# EAGLE board Arduino-Pro-Mini-GiantPanel-v14 (EAGLE 6.5.0), part 1 of 14
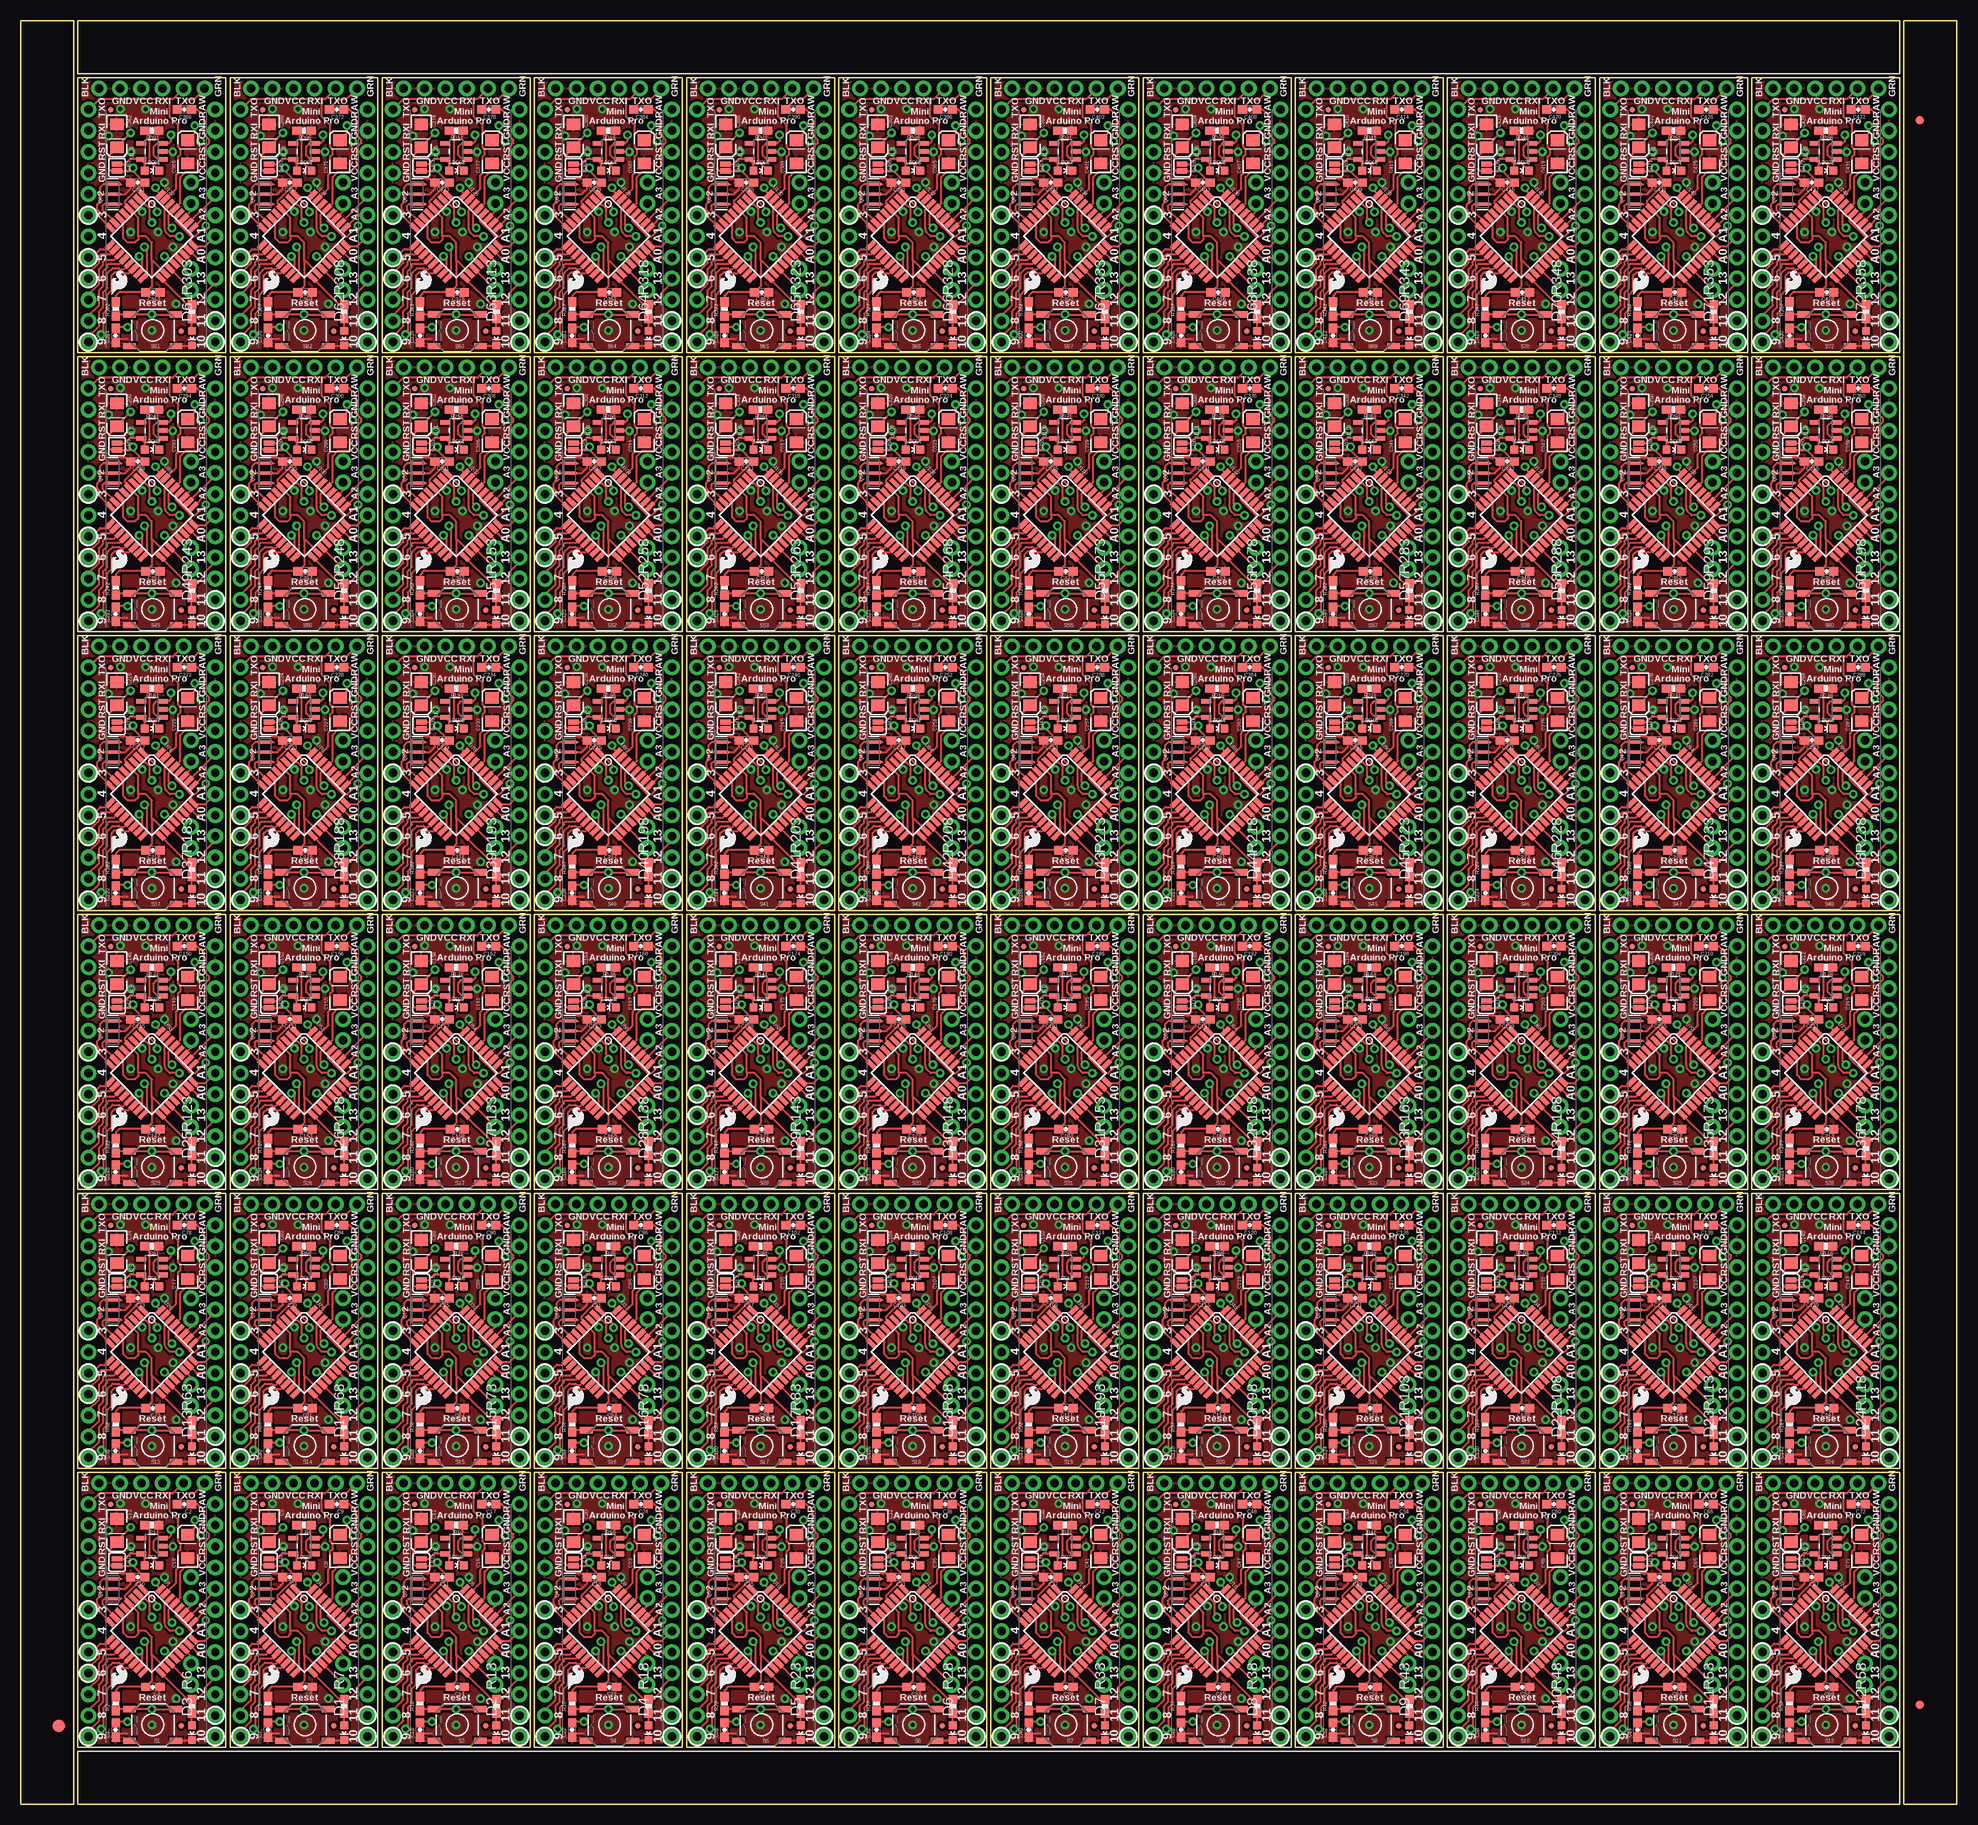
[diagram p0: board, top side]
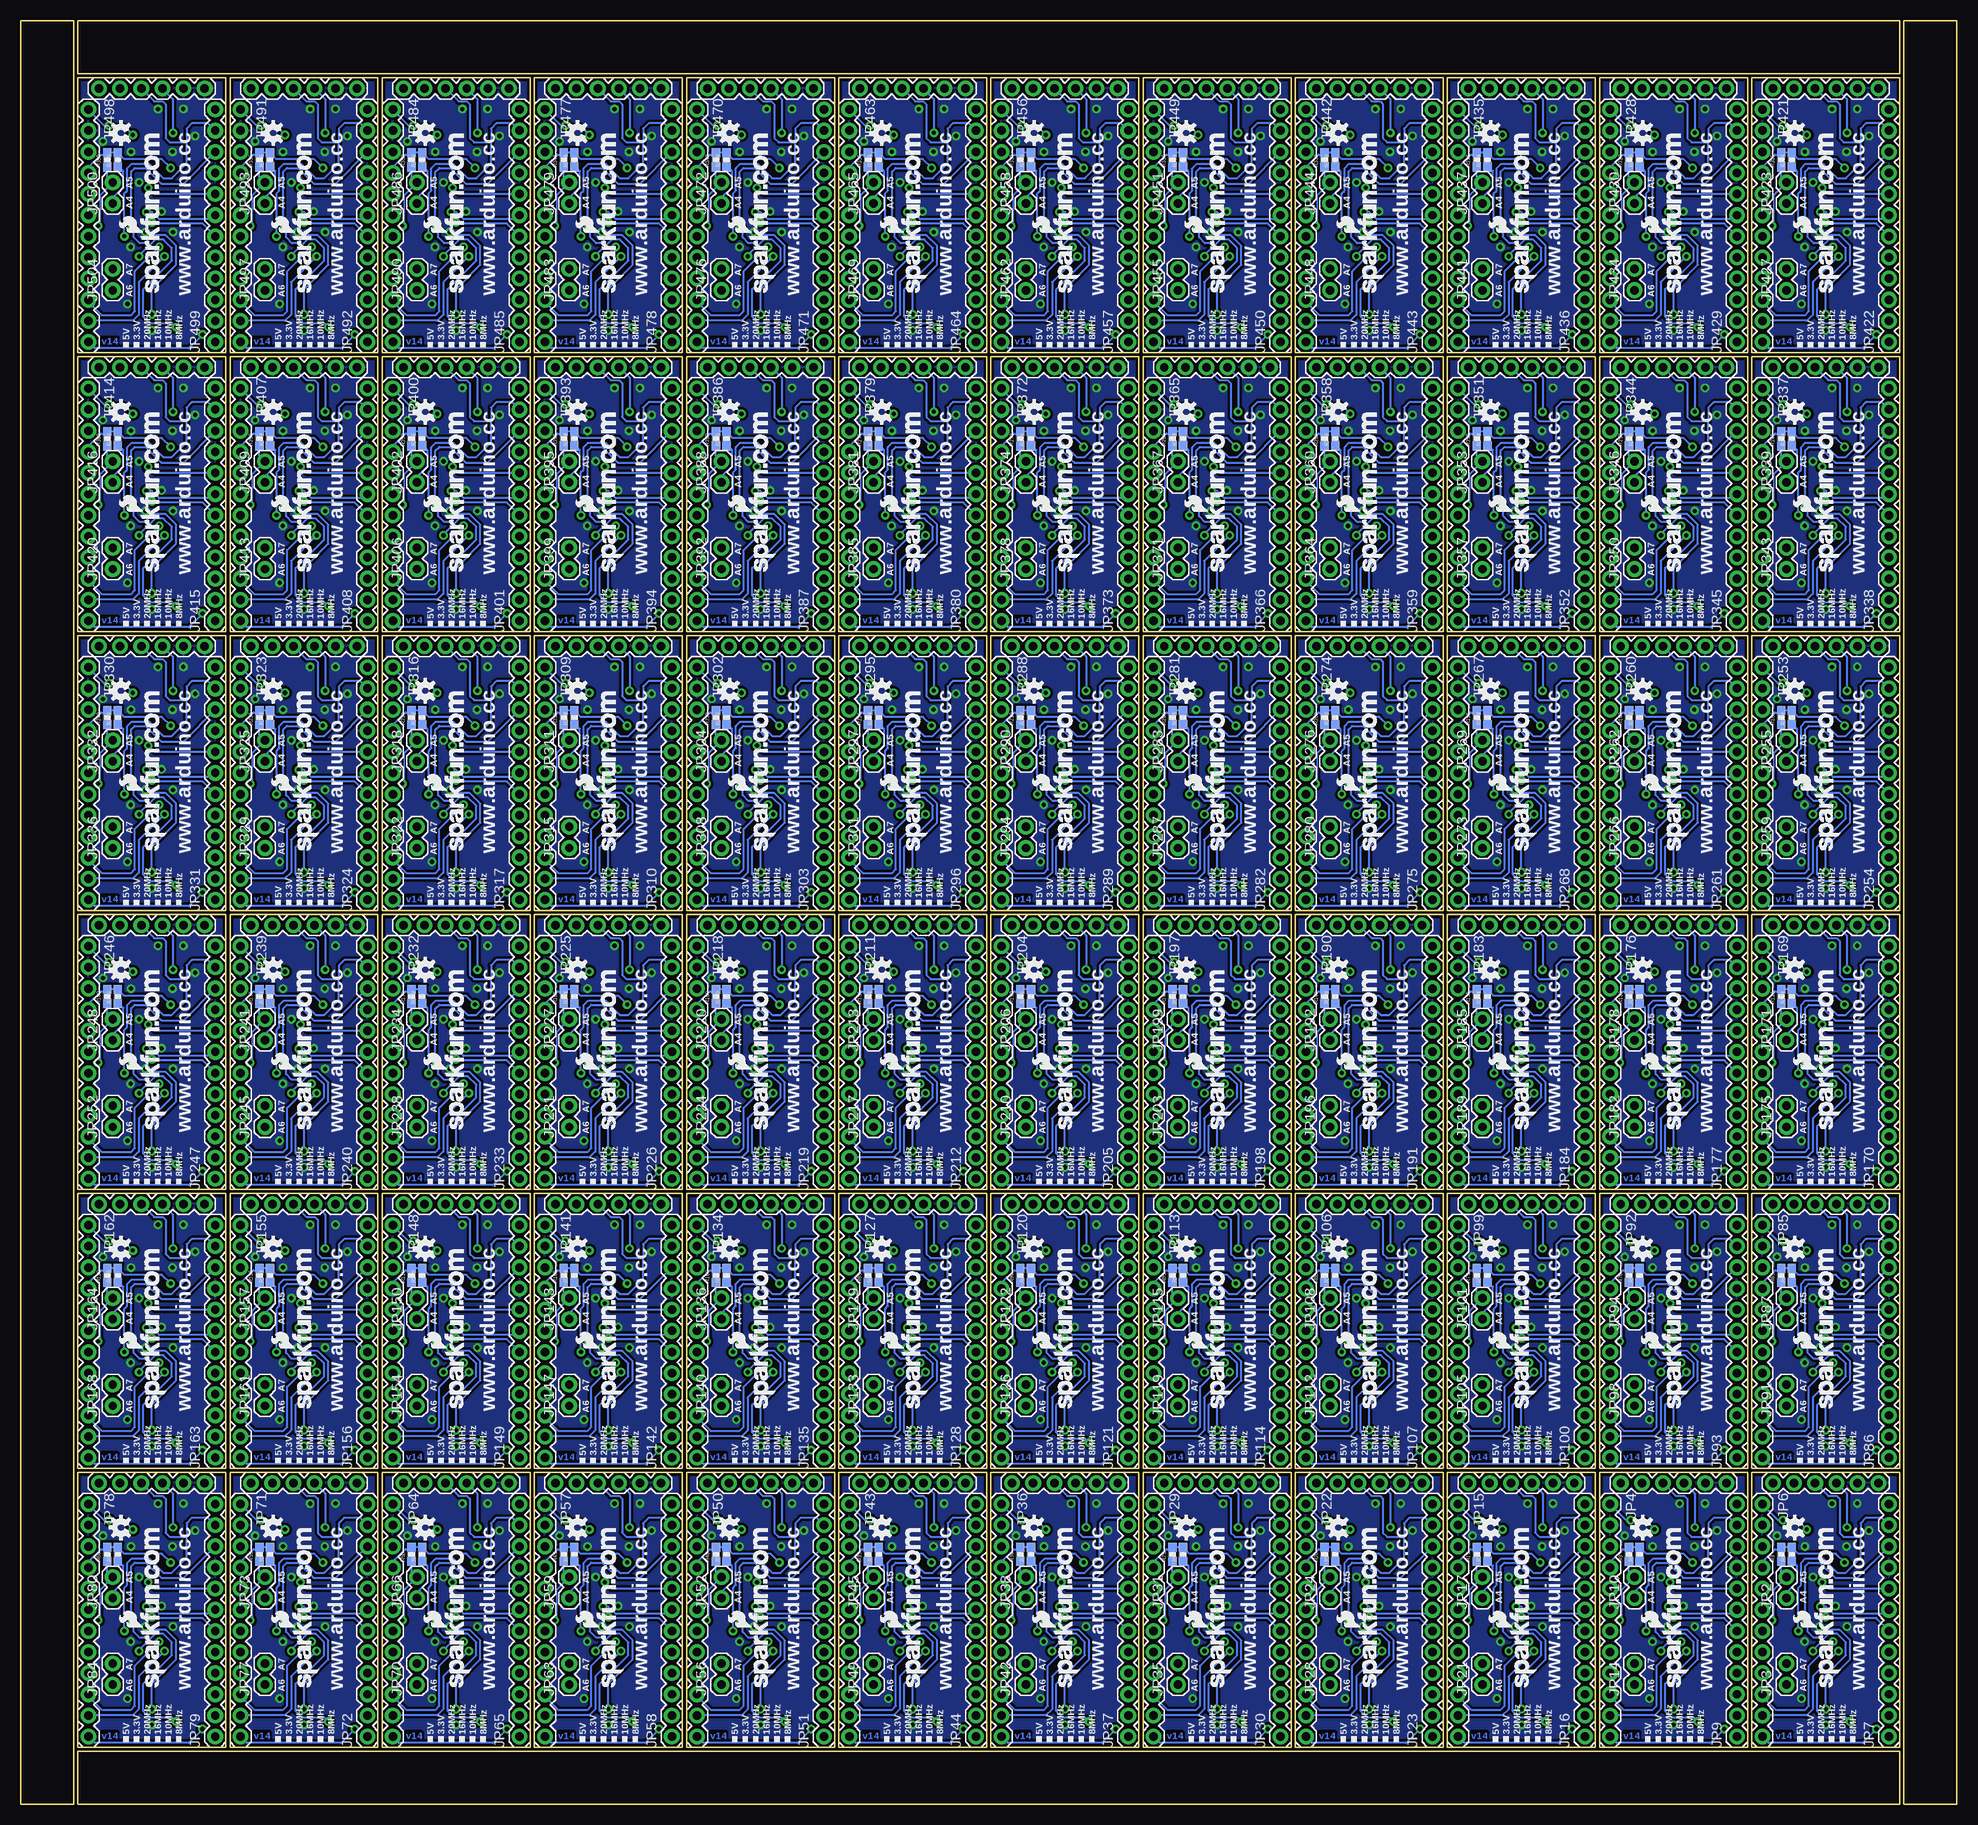
[diagram p1: board, bottom side, seen from below]

Size 232.66 x 214.38 mm. Coordinates in mm from the lower left corner, seen from the top.
Outline: 304 segments
Copper layers (1*16): Top 0.035mm / dielectric 1.5mm / Bottom 0.035mm
Design rules "SparkFun-2-layer *": minimum track width 7mil, minimum drill 15mil, track to track 8mil, track to pad 8mil, pad to pad 8mil, via to via 8mil, smd to smd 8mil, copper to edge 8mil, drill to drill 8mil, minimum pad ring 12mil, minimum via ring 10mil, stop-mask expansion 4mil, vias tented up to drill 20mil, thermal gap 10mil
Net classes: 0 default: width 0.203 mm; 1 vcc: width 0.254 mm

## Footprints (pad centres in the part's own frame; a part is rotated, then mirrored left to right if it is on the bottom)
0603-CAP = smd 1.1 x 1: 1 -0.85,0; 2 0.85,0
EIA3216 = smd 1.4 x 1.6: A 1.4,0; C -1.4,0
0603-LED-ALT1 = smd 1 x 1: A 0,-0.877; C 0,0.877
FIDUCIAL-1.5X3 = smd 1.5 x 1.5: 1 0,0
FIDUCIAL-1X2 = smd 1 x 1: 1 0,0
1X06 = drill 1.016 pad 1.88: 1 0,0; 2 2.54,0; 3 5.08,0; 4 7.62,0; 5 10.16,0; 6 12.7,0
1X02 = drill 1.016 pad 1.88: 1 0,0; 2 2.54,0
1X12 = drill 1.016 pad 1.88: 1 0,0; 2 2.54,0; 3 5.08,0; 4 7.62,0; 5 10.16,0; 6 12.7,0; 7 15.24,0; 8 17.78,0; 9 20.32,0; 10 22.86,0; 11 25.4,0; 12 27.94,0
MICRO-FIDUCIAL = smd 0.635 x 0.635: 1 0,0
RESONATOR-SMD-1:1 = smd 0.45 x 1.905: 1 -1.2,0; 2 0,0; 3 1.2,0
0603-RES = smd 1.1 x 1: 1 -0.85,0; 2 0.85,0
TACTILE-SWITCH-SMD-ALT01 = smd 1.524 x 0.762: 1 -2.794,1.905; 2 2.794,1.905; 3 -2.794,-1.905; 4 2.794,-1.905
SJ_2S = smd 0.635 x 1.27: 1 -0.412,0; 2 0.412,0
TQFP32-08 = smd 1.27 x 0.559: 1 -4.293,2.8; 2 -4.293,2; 3 -4.293,1.2; 4 -4.293,0.4; 5 -4.293,-0.4; 6 -4.293,-1.2; 7 -4.293,-2; 8 -4.293,-2.8; 17 4.293,-2.8; 18 4.293,-2; 19 4.293,-1.2; 20 4.293,-0.4; 21 4.293,0.4; 22 4.293,1.2; 23 4.293,2; 24 4.293,2.8 | smd 0.559 x 1.27: 9 -2.8,-4.293; 10 -2,-4.293; 11 -1.2,-4.293; 12 -0.4,-4.293; 13 0.4,-4.293; 14 1.2,-4.293; 15 2,-4.293; 16 2.8,-4.293; 25 2.8,4.293; 26 2,4.293; 27 1.2,4.293; 28 0.4,4.293; 29 -0.4,4.293; 30 -1.2,4.293; 31 -2,4.293; 32 -2.8,4.293
SOT23-5 = smd 0.55 x 1.2: 1 -0.95,-1.3; 2 0,-1.3; 3 0.95,-1.3; 4 0.95,1.3; 5 -0.95,1.3

## Placement (x,y rotation side)
C1  0.1uF  [0603-CAP]  11.4,8.92 90 top
C2  0.1uF  [0603-CAP]  19.66,36.07 180 top
C3  0.1uF  [0603-CAP]  15.88,14.1 180 top
C4  0.1uF  [0603-CAP]  32.33,27.28 180 top
C5  10uF  [EIA3216]  29.84,32.89 270 top
C6  0.1uF  [0603-CAP]  34.16,14.1 180 top
C7  0.1uF  [0603-CAP]  29.69,8.92 90 top
C8  10uF  [EIA3216]  38.35,30.99 90 top
C9  0.1uF  [0603-CAP]  37.95,36.07 180 top
C10  0.1uF  [0603-CAP]  14.05,27.28 180 top
C11  0.1uF  [0603-CAP]  50.62,27.28 180 top
C12  10uF  [EIA3216]  48.13,32.89 270 top
C13  10uF  [EIA3216]  11.56,32.89 270 top
C14  0.1uF  [0603-CAP]  52.45,14.1 180 top
C15  0.1uF  [0603-CAP]  47.98,8.92 90 top
C16  10uF  [EIA3216]  56.64,30.99 90 top
C17  0.1uF  [0603-CAP]  56.24,36.07 180 top
C18  0.1uF  [0603-CAP]  68.91,27.28 180 top
C19  10uF  [EIA3216]  20.07,30.99 90 top
C20  10uF  [EIA3216]  66.42,32.89 270 top
C21  0.1uF  [0603-CAP]  70.74,14.1 180 top
C22  0.1uF  [0603-CAP]  66.27,8.92 90 top
C23  10uF  [EIA3216]  74.93,30.99 90 top
C24  0.1uF  [0603-CAP]  74.52,36.07 180 top
C25  0.1uF  [0603-CAP]  87.2,27.28 180 top
C26  10uF  [EIA3216]  84.71,32.89 270 top
C27  0.1uF  [0603-CAP]  89.03,14.1 180 top
C28  0.1uF  [0603-CAP]  84.56,8.92 90 top
C29  10uF  [EIA3216]  93.22,30.99 90 top
C30  0.1uF  [0603-CAP]  92.81,36.07 180 top
C31  0.1uF  [0603-CAP]  105.49,27.28 180 top
C32  10uF  [EIA3216]  103,32.89 270 top
C33  0.1uF  [0603-CAP]  107.31,14.1 180 top
C34  0.1uF  [0603-CAP]  102.84,8.92 90 top
C35  10uF  [EIA3216]  111.51,30.99 90 top
C36  0.1uF  [0603-CAP]  111.1,36.07 180 top
C37  0.1uF  [0603-CAP]  123.77,27.28 180 top
C38  10uF  [EIA3216]  121.28,32.89 270 top
C39  0.1uF  [0603-CAP]  125.6,14.1 180 top
C40  0.1uF  [0603-CAP]  121.13,8.92 90 top
C41  10uF  [EIA3216]  129.79,30.99 90 top
C42  0.1uF  [0603-CAP]  129.39,36.07 180 top
C43  0.1uF  [0603-CAP]  142.06,27.28 180 top
C44  10uF  [EIA3216]  139.57,32.89 270 top
C45  0.1uF  [0603-CAP]  143.89,14.1 180 top
C46  0.1uF  [0603-CAP]  139.42,8.92 90 top
C47  10uF  [EIA3216]  148.08,30.99 90 top
C48  0.1uF  [0603-CAP]  147.68,36.07 180 top
C49  0.1uF  [0603-CAP]  160.35,27.28 180 top
C50  10uF  [EIA3216]  157.86,32.89 270 top
C51  0.1uF  [0603-CAP]  162.18,14.1 180 top
C52  0.1uF  [0603-CAP]  157.71,8.92 90 top
C53  10uF  [EIA3216]  166.37,30.99 90 top
C54  0.1uF  [0603-CAP]  165.96,36.07 180 top
C55  0.1uF  [0603-CAP]  178.64,27.28 180 top
C56  10uF  [EIA3216]  176.15,32.89 270 top
C57  0.1uF  [0603-CAP]  180.47,14.1 180 top
C58  0.1uF  [0603-CAP]  176,8.92 90 top
C59  10uF  [EIA3216]  184.66,30.99 90 top
C60  0.1uF  [0603-CAP]  184.25,36.07 180 top
C61  0.1uF  [0603-CAP]  196.93,27.28 180 top
C62  10uF  [EIA3216]  194.44,32.89 270 top
C63  0.1uF  [0603-CAP]  198.75,14.1 180 top
C64  0.1uF  [0603-CAP]  194.28,8.92 90 top
C65  10uF  [EIA3216]  202.95,30.99 90 top
C66  0.1uF  [0603-CAP]  202.54,36.07 180 top
C67  0.1uF  [0603-CAP]  215.21,27.28 180 top
C68  10uF  [EIA3216]  212.72,32.89 270 top
C69  0.1uF  [0603-CAP]  217.04,14.1 180 top
C70  0.1uF  [0603-CAP]  212.57,8.92 90 top
C71  10uF  [EIA3216]  221.23,30.99 90 top
C72  0.1uF  [0603-CAP]  220.83,36.07 180 top
C73  0.1uF  [0603-CAP]  14.05,60.81 180 top
C74  10uF  [EIA3216]  11.56,66.42 270 top
C75  0.1uF  [0603-CAP]  15.88,47.62 180 top
C76  0.1uF  [0603-CAP]  11.4,42.44 90 top
C77  10uF  [EIA3216]  20.07,64.52 90 top
C78  0.1uF  [0603-CAP]  19.66,69.6 180 top
C79  0.1uF  [0603-CAP]  32.33,60.81 180 top
C80  10uF  [EIA3216]  29.84,66.42 270 top
C81  0.1uF  [0603-CAP]  34.16,47.62 180 top
C82  0.1uF  [0603-CAP]  29.69,42.44 90 top
C83  10uF  [EIA3216]  38.35,64.52 90 top
C84  0.1uF  [0603-CAP]  37.95,69.6 180 top
C85  0.1uF  [0603-CAP]  50.62,60.81 180 top
C86  10uF  [EIA3216]  48.13,66.42 270 top
C87  0.1uF  [0603-CAP]  52.45,47.62 180 top
C88  0.1uF  [0603-CAP]  47.98,42.44 90 top
C89  10uF  [EIA3216]  56.64,64.52 90 top
C90  0.1uF  [0603-CAP]  56.24,69.6 180 top
C91  0.1uF  [0603-CAP]  68.91,60.81 180 top
C92  10uF  [EIA3216]  66.42,66.42 270 top
C93  0.1uF  [0603-CAP]  70.74,47.62 180 top
C94  0.1uF  [0603-CAP]  66.27,42.44 90 top
C95  10uF  [EIA3216]  74.93,64.52 90 top
C96  0.1uF  [0603-CAP]  74.52,69.6 180 top
C97  0.1uF  [0603-CAP]  87.2,60.81 180 top
C98  10uF  [EIA3216]  84.71,66.42 270 top
C99  0.1uF  [0603-CAP]  89.03,47.62 180 top
C100  0.1uF  [0603-CAP]  84.56,42.44 90 top
C101  10uF  [EIA3216]  93.22,64.52 90 top
C102  0.1uF  [0603-CAP]  92.81,69.6 180 top
C103  0.1uF  [0603-CAP]  105.49,60.81 180 top
C104  10uF  [EIA3216]  103,66.42 270 top
C105  0.1uF  [0603-CAP]  107.31,47.62 180 top
C106  0.1uF  [0603-CAP]  102.84,42.44 90 top
C107  10uF  [EIA3216]  111.51,64.52 90 top
C108  0.1uF  [0603-CAP]  111.1,69.6 180 top
C109  0.1uF  [0603-CAP]  123.77,60.81 180 top
C110  10uF  [EIA3216]  121.28,66.42 270 top
C111  0.1uF  [0603-CAP]  125.6,47.62 180 top
C112  0.1uF  [0603-CAP]  121.13,42.44 90 top
C113  10uF  [EIA3216]  129.79,64.52 90 top
C114  0.1uF  [0603-CAP]  129.39,69.6 180 top
C115  0.1uF  [0603-CAP]  142.06,60.81 180 top
C116  10uF  [EIA3216]  139.57,66.42 270 top
C117  0.1uF  [0603-CAP]  143.89,47.62 180 top
C118  0.1uF  [0603-CAP]  139.42,42.44 90 top
C119  10uF  [EIA3216]  148.08,64.52 90 top
C120  0.1uF  [0603-CAP]  147.68,69.6 180 top
C121  0.1uF  [0603-CAP]  160.35,60.81 180 top
C122  10uF  [EIA3216]  157.86,66.42 270 top
C123  0.1uF  [0603-CAP]  162.18,47.62 180 top
C124  0.1uF  [0603-CAP]  157.71,42.44 90 top
C125  10uF  [EIA3216]  166.37,64.52 90 top
C126  0.1uF  [0603-CAP]  165.96,69.6 180 top
C127  0.1uF  [0603-CAP]  178.64,60.81 180 top
C128  10uF  [EIA3216]  176.15,66.42 270 top
C129  0.1uF  [0603-CAP]  180.47,47.62 180 top
C130  0.1uF  [0603-CAP]  176,42.44 90 top
C131  10uF  [EIA3216]  184.66,64.52 90 top
C132  0.1uF  [0603-CAP]  184.25,69.6 180 top
C133  0.1uF  [0603-CAP]  196.93,60.81 180 top
C134  10uF  [EIA3216]  194.44,66.42 270 top
C135  0.1uF  [0603-CAP]  198.75,47.62 180 top
C136  0.1uF  [0603-CAP]  194.28,42.44 90 top
C137  10uF  [EIA3216]  202.95,64.52 90 top
C138  0.1uF  [0603-CAP]  202.54,69.6 180 top
C139  0.1uF  [0603-CAP]  215.21,60.81 180 top
C140  10uF  [EIA3216]  212.72,66.42 270 top
C141  0.1uF  [0603-CAP]  217.04,47.62 180 top
C142  0.1uF  [0603-CAP]  212.57,42.44 90 top
C143  10uF  [EIA3216]  221.23,64.52 90 top
C144  0.1uF  [0603-CAP]  220.83,69.6 180 top
C145  0.1uF  [0603-CAP]  14.05,94.34 180 top
C146  10uF  [EIA3216]  11.56,99.95 270 top
C147  0.1uF  [0603-CAP]  15.88,81.15 180 top
C148  0.1uF  [0603-CAP]  11.4,75.97 90 top
C149  10uF  [EIA3216]  20.07,98.04 90 top
C150  0.1uF  [0603-CAP]  19.66,103.12 180 top
C151  0.1uF  [0603-CAP]  32.33,94.34 180 top
C152  10uF  [EIA3216]  29.84,99.95 270 top
C153  0.1uF  [0603-CAP]  34.16,81.15 180 top
C154  0.1uF  [0603-CAP]  29.69,75.97 90 top
C155  10uF  [EIA3216]  38.35,98.04 90 top
C156  0.1uF  [0603-CAP]  37.95,103.12 180 top
C157  0.1uF  [0603-CAP]  50.62,94.34 180 top
C158  10uF  [EIA3216]  48.13,99.95 270 top
C159  0.1uF  [0603-CAP]  52.45,81.15 180 top
C160  0.1uF  [0603-CAP]  47.98,75.97 90 top
C161  10uF  [EIA3216]  56.64,98.04 90 top
C162  0.1uF  [0603-CAP]  56.24,103.12 180 top
C163  0.1uF  [0603-CAP]  68.91,94.34 180 top
C164  10uF  [EIA3216]  66.42,99.95 270 top
C165  0.1uF  [0603-CAP]  70.74,81.15 180 top
C166  0.1uF  [0603-CAP]  66.27,75.97 90 top
C167  10uF  [EIA3216]  74.93,98.04 90 top
C168  0.1uF  [0603-CAP]  74.52,103.12 180 top
C169  0.1uF  [0603-CAP]  87.2,94.34 180 top
C170  10uF  [EIA3216]  84.71,99.95 270 top
C171  0.1uF  [0603-CAP]  89.03,81.15 180 top
C172  0.1uF  [0603-CAP]  84.56,75.97 90 top
C173  10uF  [EIA3216]  93.22,98.04 90 top
C174  0.1uF  [0603-CAP]  92.81,103.12 180 top
C175  0.1uF  [0603-CAP]  105.49,94.34 180 top
C176  10uF  [EIA3216]  103,99.95 270 top
C177  0.1uF  [0603-CAP]  107.31,81.15 180 top
C178  0.1uF  [0603-CAP]  102.84,75.97 90 top
C179  10uF  [EIA3216]  111.51,98.04 90 top
C180  0.1uF  [0603-CAP]  111.1,103.12 180 top
C181  0.1uF  [0603-CAP]  123.77,94.34 180 top
C182  10uF  [EIA3216]  121.28,99.95 270 top
C183  0.1uF  [0603-CAP]  125.6,81.15 180 top
C184  0.1uF  [0603-CAP]  121.13,75.97 90 top
C185  10uF  [EIA3216]  129.79,98.04 90 top
C186  0.1uF  [0603-CAP]  129.39,103.12 180 top
C187  0.1uF  [0603-CAP]  142.06,94.34 180 top
C188  10uF  [EIA3216]  139.57,99.95 270 top
C189  0.1uF  [0603-CAP]  143.89,81.15 180 top
C190  0.1uF  [0603-CAP]  139.42,75.97 90 top
C191  10uF  [EIA3216]  148.08,98.04 90 top
C192  0.1uF  [0603-CAP]  147.68,103.12 180 top
C193  0.1uF  [0603-CAP]  160.35,94.34 180 top
C194  10uF  [EIA3216]  157.86,99.95 270 top
C195  0.1uF  [0603-CAP]  162.18,81.15 180 top
C196  0.1uF  [0603-CAP]  157.71,75.97 90 top
C197  10uF  [EIA3216]  166.37,98.04 90 top
C198  0.1uF  [0603-CAP]  165.96,103.12 180 top
C199  0.1uF  [0603-CAP]  178.64,94.34 180 top
C200  10uF  [EIA3216]  176.15,99.95 270 top
C201  0.1uF  [0603-CAP]  180.47,81.15 180 top
C202  0.1uF  [0603-CAP]  176,75.97 90 top
C203  10uF  [EIA3216]  184.66,98.04 90 top
C204  0.1uF  [0603-CAP]  184.25,103.12 180 top
C205  0.1uF  [0603-CAP]  196.93,94.34 180 top
C206  10uF  [EIA3216]  194.44,99.95 270 top
C207  0.1uF  [0603-CAP]  198.75,81.15 180 top
C208  0.1uF  [0603-CAP]  194.28,75.97 90 top
C209  10uF  [EIA3216]  202.95,98.04 90 top
C210  0.1uF  [0603-CAP]  202.54,103.12 180 top
C211  0.1uF  [0603-CAP]  215.21,94.34 180 top
C212  10uF  [EIA3216]  212.72,99.95 270 top
C213  0.1uF  [0603-CAP]  217.04,81.15 180 top
C214  0.1uF  [0603-CAP]  212.57,75.97 90 top
C215  10uF  [EIA3216]  221.23,98.04 90 top
C216  0.1uF  [0603-CAP]  220.83,103.12 180 top
C217  0.1uF  [0603-CAP]  14.05,127.86 180 top
C218  10uF  [EIA3216]  11.56,133.48 270 top
C219  0.1uF  [0603-CAP]  15.88,114.68 180 top
C220  0.1uF  [0603-CAP]  11.4,109.5 90 top
C221  10uF  [EIA3216]  20.07,131.57 90 top
C222  0.1uF  [0603-CAP]  19.66,136.65 180 top
C223  0.1uF  [0603-CAP]  32.33,127.86 180 top
C224  10uF  [EIA3216]  29.84,133.48 270 top
C225  0.1uF  [0603-CAP]  34.16,114.68 180 top
C226  0.1uF  [0603-CAP]  29.69,109.5 90 top
C227  10uF  [EIA3216]  38.35,131.57 90 top
C228  0.1uF  [0603-CAP]  37.95,136.65 180 top
C229  0.1uF  [0603-CAP]  50.62,127.86 180 top
C230  10uF  [EIA3216]  48.13,133.48 270 top
C231  0.1uF  [0603-CAP]  52.45,114.68 180 top
C232  0.1uF  [0603-CAP]  47.98,109.5 90 top
C233  10uF  [EIA3216]  56.64,131.57 90 top
C234  0.1uF  [0603-CAP]  56.24,136.65 180 top
C235  0.1uF  [0603-CAP]  68.91,127.86 180 top
C236  10uF  [EIA3216]  66.42,133.48 270 top
C237  0.1uF  [0603-CAP]  70.74,114.68 180 top
C238  0.1uF  [0603-CAP]  66.27,109.5 90 top
C239  10uF  [EIA3216]  74.93,131.57 90 top
C240  0.1uF  [0603-CAP]  74.52,136.65 180 top
C241  0.1uF  [0603-CAP]  87.2,127.86 180 top
C242  10uF  [EIA3216]  84.71,133.48 270 top
C243  0.1uF  [0603-CAP]  89.03,114.68 180 top
C244  0.1uF  [0603-CAP]  84.56,109.5 90 top
C245  10uF  [EIA3216]  93.22,131.57 90 top
C246  0.1uF  [0603-CAP]  92.81,136.65 180 top
C247  0.1uF  [0603-CAP]  105.49,127.86 180 top
C248  10uF  [EIA3216]  103,133.48 270 top
C249  0.1uF  [0603-CAP]  107.31,114.68 180 top
C250  0.1uF  [0603-CAP]  102.84,109.5 90 top
C251  10uF  [EIA3216]  111.51,131.57 90 top
C252  0.1uF  [0603-CAP]  111.1,136.65 180 top
C253  0.1uF  [0603-CAP]  123.77,127.86 180 top
C254  10uF  [EIA3216]  121.28,133.48 270 top
C255  0.1uF  [0603-CAP]  125.6,114.68 180 top
C256  0.1uF  [0603-CAP]  121.13,109.5 90 top
C257  10uF  [EIA3216]  129.79,131.57 90 top
C258  0.1uF  [0603-CAP]  129.39,136.65 180 top
C259  0.1uF  [0603-CAP]  142.06,127.86 180 top
C260  10uF  [EIA3216]  139.57,133.48 270 top
C261  0.1uF  [0603-CAP]  143.89,114.68 180 top
C262  0.1uF  [0603-CAP]  139.42,109.5 90 top
C263  10uF  [EIA3216]  148.08,131.57 90 top
C264  0.1uF  [0603-CAP]  147.68,136.65 180 top
C265  0.1uF  [0603-CAP]  160.35,127.86 180 top
C266  10uF  [EIA3216]  157.86,133.48 270 top
C267  0.1uF  [0603-CAP]  162.18,114.68 180 top
C268  0.1uF  [0603-CAP]  157.71,109.5 90 top
C269  10uF  [EIA3216]  166.37,131.57 90 top
C270  0.1uF  [0603-CAP]  165.96,136.65 180 top
C271  0.1uF  [0603-CAP]  178.64,127.86 180 top
C272  10uF  [EIA3216]  176.15,133.48 270 top
C273  0.1uF  [0603-CAP]  180.47,114.68 180 top
C274  0.1uF  [0603-CAP]  176,109.5 90 top
C275  10uF  [EIA3216]  184.66,131.57 90 top
C276  0.1uF  [0603-CAP]  184.25,136.65 180 top
C277  0.1uF  [0603-CAP]  196.93,127.86 180 top
C278  10uF  [EIA3216]  194.44,133.48 270 top
C279  0.1uF  [0603-CAP]  198.75,114.68 180 top
C280  0.1uF  [0603-CAP]  194.28,109.5 90 top
C281  10uF  [EIA3216]  202.95,131.57 90 top
C282  0.1uF  [0603-CAP]  202.54,136.65 180 top
C283  0.1uF  [0603-CAP]  215.21,127.86 180 top
C284  10uF  [EIA3216]  212.72,133.48 270 top
C285  0.1uF  [0603-CAP]  217.04,114.68 180 top
C286  0.1uF  [0603-CAP]  212.57,109.5 90 top
C287  10uF  [EIA3216]  221.23,131.57 90 top
C288  0.1uF  [0603-CAP]  220.83,136.65 180 top
C289  0.1uF  [0603-CAP]  14.05,161.39 180 top
C290  10uF  [EIA3216]  11.56,167 270 top
C291  0.1uF  [0603-CAP]  15.88,148.21 180 top
C292  0.1uF  [0603-CAP]  11.4,143.03 90 top
C293  10uF  [EIA3216]  20.07,165.1 90 top
C294  0.1uF  [0603-CAP]  19.66,170.18 180 top
C295  0.1uF  [0603-CAP]  32.33,161.39 180 top
C296  10uF  [EIA3216]  29.84,167 270 top
C297  0.1uF  [0603-CAP]  34.16,148.21 180 top
C298  0.1uF  [0603-CAP]  29.69,143.03 90 top
C299  10uF  [EIA3216]  38.35,165.1 90 top
C300  0.1uF  [0603-CAP]  37.95,170.18 180 top
C301  0.1uF  [0603-CAP]  50.62,161.39 180 top
C302  10uF  [EIA3216]  48.13,167 270 top
C303  0.1uF  [0603-CAP]  52.45,148.21 180 top
C304  0.1uF  [0603-CAP]  47.98,143.03 90 top
C305  10uF  [EIA3216]  56.64,165.1 90 top
C306  0.1uF  [0603-CAP]  56.24,170.18 180 top
C307  0.1uF  [0603-CAP]  68.91,161.39 180 top
C308  10uF  [EIA3216]  66.42,167 270 top
C309  0.1uF  [0603-CAP]  70.74,148.21 180 top
C310  0.1uF  [0603-CAP]  66.27,143.03 90 top
C311  10uF  [EIA3216]  74.93,165.1 90 top
C312  0.1uF  [0603-CAP]  74.52,170.18 180 top
C313  0.1uF  [0603-CAP]  87.2,161.39 180 top
C314  10uF  [EIA3216]  84.71,167 270 top
C315  0.1uF  [0603-CAP]  89.03,148.21 180 top
C316  0.1uF  [0603-CAP]  84.56,143.03 90 top
C317  10uF  [EIA3216]  93.22,165.1 90 top
C318  0.1uF  [0603-CAP]  92.81,170.18 180 top
C319  0.1uF  [0603-CAP]  105.49,161.39 180 top
C320  10uF  [EIA3216]  103,167 270 top
C321  0.1uF  [0603-CAP]  107.31,148.21 180 top
C322  0.1uF  [0603-CAP]  102.84,143.03 90 top
C323  10uF  [EIA3216]  111.51,165.1 90 top
C324  0.1uF  [0603-CAP]  111.1,170.18 180 top
C325  0.1uF  [0603-CAP]  123.77,161.39 180 top
C326  10uF  [EIA3216]  121.28,167 270 top
C327  0.1uF  [0603-CAP]  125.6,148.21 180 top
C328  0.1uF  [0603-CAP]  121.13,143.03 90 top
C329  10uF  [EIA3216]  129.79,165.1 90 top
C330  0.1uF  [0603-CAP]  129.39,170.18 180 top
C331  0.1uF  [0603-CAP]  142.06,161.39 180 top
C332  10uF  [EIA3216]  139.57,167 270 top
C333  0.1uF  [0603-CAP]  143.89,148.21 180 top
C334  0.1uF  [0603-CAP]  139.42,143.03 90 top
C335  10uF  [EIA3216]  148.08,165.1 90 top
C336  0.1uF  [0603-CAP]  147.68,170.18 180 top
C337  0.1uF  [0603-CAP]  160.35,161.39 180 top
C338  10uF  [EIA3216]  157.86,167 270 top
C339  0.1uF  [0603-CAP]  162.18,148.21 180 top
C340  0.1uF  [0603-CAP]  157.71,143.03 90 top
C341  10uF  [EIA3216]  166.37,165.1 90 top
C342  0.1uF  [0603-CAP]  165.96,170.18 180 top
C343  0.1uF  [0603-CAP]  178.64,161.39 180 top
C344  10uF  [EIA3216]  176.15,167 270 top
C345  0.1uF  [0603-CAP]  180.47,148.21 180 top
C346  0.1uF  [0603-CAP]  176,143.03 90 top
C347  10uF  [EIA3216]  184.66,165.1 90 top
C348  0.1uF  [0603-CAP]  184.25,170.18 180 top
C349  0.1uF  [0603-CAP]  196.93,161.39 180 top
C350  10uF  [EIA3216]  194.44,167 270 top
C351  0.1uF  [0603-CAP]  198.75,148.21 180 top
C352  0.1uF  [0603-CAP]  194.28,143.03 90 top
C353  10uF  [EIA3216]  202.95,165.1 90 top
C354  0.1uF  [0603-CAP]  202.54,170.18 180 top
C355  0.1uF  [0603-CAP]  215.21,161.39 180 top
C356  10uF  [EIA3216]  212.72,167 270 top
C357  0.1uF  [0603-CAP]  217.04,148.21 180 top
C358  0.1uF  [0603-CAP]  212.57,143.03 90 top
C359  10uF  [EIA3216]  221.23,165.1 90 top
C360  0.1uF  [0603-CAP]  220.83,170.18 180 top
C361  0.1uF  [0603-CAP]  14.05,194.92 180 top
C362  10uF  [EIA3216]  11.56,200.53 270 top
C363  0.1uF  [0603-CAP]  15.88,181.74 180 top
C364  0.1uF  [0603-CAP]  11.4,176.56 90 top
C365  10uF  [EIA3216]  20.07,198.63 90 top
C366  0.1uF  [0603-CAP]  19.66,203.71 180 top
C367  0.1uF  [0603-CAP]  32.33,194.92 180 top
C368  10uF  [EIA3216]  29.84,200.53 270 top
C369  0.1uF  [0603-CAP]  34.16,181.74 180 top
C370  0.1uF  [0603-CAP]  29.69,176.56 90 top
C371  10uF  [EIA3216]  38.35,198.63 90 top
C372  0.1uF  [0603-CAP]  37.95,203.71 180 top
C373  0.1uF  [0603-CAP]  50.62,194.92 180 top
C374  10uF  [EIA3216]  48.13,200.53 270 top
C375  0.1uF  [0603-CAP]  52.45,181.74 180 top
C376  0.1uF  [0603-CAP]  47.98,176.56 90 top
C377  10uF  [EIA3216]  56.64,198.63 90 top
C378  0.1uF  [0603-CAP]  56.24,203.71 180 top
C379  0.1uF  [0603-CAP]  68.91,194.92 180 top
C380  10uF  [EIA3216]  66.42,200.53 270 top
C381  0.1uF  [0603-CAP]  70.74,181.74 180 top
C382  0.1uF  [0603-CAP]  66.27,176.56 90 top
C383  10uF  [EIA3216]  74.93,198.63 90 top
C384  0.1uF  [0603-CAP]  74.52,203.71 180 top
C385  0.1uF  [0603-CAP]  87.2,194.92 180 top
C386  10uF  [EIA3216]  84.71,200.53 270 top
C387  0.1uF  [0603-CAP]  89.03,181.74 180 top
C388  0.1uF  [0603-CAP]  84.56,176.56 90 top
C389  10uF  [EIA3216]  93.22,198.63 90 top
C390  0.1uF  [0603-CAP]  92.81,203.71 180 top
C391  0.1uF  [0603-CAP]  105.49,194.92 180 top
C392  10uF  [EIA3216]  103,200.53 270 top
C393  0.1uF  [0603-CAP]  107.31,181.74 180 top
C394  0.1uF  [0603-CAP]  102.84,176.56 90 top
C395  10uF  [EIA3216]  111.51,198.63 90 top
C396  0.1uF  [0603-CAP]  111.1,203.71 180 top
C397  0.1uF  [0603-CAP]  123.77,194.92 180 top
C398  10uF  [EIA3216]  121.28,200.53 270 top
C399  0.1uF  [0603-CAP]  125.6,181.74 180 top
C400  0.1uF  [0603-CAP]  121.13,176.56 90 top
C401  10uF  [EIA3216]  129.79,198.63 90 top
C402  0.1uF  [0603-CAP]  129.39,203.71 180 top
C403  0.1uF  [0603-CAP]  142.06,194.92 180 top
C404  10uF  [EIA3216]  139.57,200.53 270 top
C405  0.1uF  [0603-CAP]  143.89,181.74 180 top
C406  0.1uF  [0603-CAP]  139.42,176.56 90 top
C407  10uF  [EIA3216]  148.08,198.63 90 top
C408  0.1uF  [0603-CAP]  147.68,203.71 180 top
C409  0.1uF  [0603-CAP]  160.35,194.92 180 top
C410  10uF  [EIA3216]  157.86,200.53 270 top
C411  0.1uF  [0603-CAP]  162.18,181.74 180 top
C412  0.1uF  [0603-CAP]  157.71,176.56 90 top
C413  10uF  [EIA3216]  166.37,198.63 90 top
C414  0.1uF  [0603-CAP]  165.96,203.71 180 top
C415  0.1uF  [0603-CAP]  178.64,194.92 180 top
C416  10uF  [EIA3216]  176.15,200.53 270 top
C417  0.1uF  [0603-CAP]  180.47,181.74 180 top
C418  0.1uF  [0603-CAP]  176,176.56 90 top
C419  10uF  [EIA3216]  184.66,198.63 90 top
C420  0.1uF  [0603-CAP]  184.25,203.71 180 top
C421  0.1uF  [0603-CAP]  196.93,194.92 180 top
C422  10uF  [EIA3216]  194.44,200.53 270 top
C423  0.1uF  [0603-CAP]  198.75,181.74 180 top
C424  0.1uF  [0603-CAP]  194.28,176.56 90 top
C425  10uF  [EIA3216]  202.95,198.63 90 top
C426  0.1uF  [0603-CAP]  202.54,203.71 180 top
C427  0.1uF  [0603-CAP]  215.21,194.92 180 top
C428  10uF  [EIA3216]  212.72,200.53 270 top
C429  0.1uF  [0603-CAP]  217.04,181.74 180 top
C430  0.1uF  [0603-CAP]  212.57,176.56 90 top
C431  10uF  [EIA3216]  221.23,198.63 90 top
C432  0.1uF  [0603-CAP]  220.83,203.71 180 top
D1  Green  [0603-LED-ALT1]  38.86,8.59 180 top
D2  Green  [0603-LED-ALT1]  57.15,8.59 180 top
D3  Green  [0603-LED-ALT1]  20.57,8.59 180 top
D4  Green  [0603-LED-ALT1]  75.44,8.59 180 top
D5  Green  [0603-LED-ALT1]  93.73,8.59 180 top
D6  Green  [0603-LED-ALT1]  112.01,8.59 180 top
D7  Green  [0603-LED-ALT1]  130.3,8.59 180 top
D8  Green  [0603-LED-ALT1]  148.59,8.59 180 top
D9  Green  [0603-LED-ALT1]  166.88,8.59 180 top
D10  Green  [0603-LED-ALT1]  185.17,8.59 180 top
D11  Green  [0603-LED-ALT1]  203.45,8.59 180 top
D12  Green  [0603-LED-ALT1]  221.74,8.59 180 top
D13  Green  [0603-LED-ALT1]  20.57,42.11 180 top
D14  Green  [0603-LED-ALT1]  38.86,42.11 180 top
D15  Green  [0603-LED-ALT1]  57.15,42.11 180 top
D16  Green  [0603-LED-ALT1]  75.44,42.11 180 top
D17  Green  [0603-LED-ALT1]  93.73,42.11 180 top
D18  Green  [0603-LED-ALT1]  112.01,42.11 180 top
D19  Green  [0603-LED-ALT1]  130.3,42.11 180 top
D20  Green  [0603-LED-ALT1]  148.59,42.11 180 top
D21  Green  [0603-LED-ALT1]  166.88,42.11 180 top
D22  Green  [0603-LED-ALT1]  185.17,42.11 180 top
D23  Green  [0603-LED-ALT1]  203.45,42.11 180 top
D24  Green  [0603-LED-ALT1]  221.74,42.11 180 top
D25  Green  [0603-LED-ALT1]  20.57,75.64 180 top
D26  Green  [0603-LED-ALT1]  38.86,75.64 180 top
D27  Green  [0603-LED-ALT1]  57.15,75.64 180 top
D28  Green  [0603-LED-ALT1]  75.44,75.64 180 top
D29  Green  [0603-LED-ALT1]  93.73,75.64 180 top
D30  Green  [0603-LED-ALT1]  112.01,75.64 180 top
D31  Green  [0603-LED-ALT1]  130.3,75.64 180 top
D32  Green  [0603-LED-ALT1]  148.59,75.64 180 top
D33  Green  [0603-LED-ALT1]  166.88,75.64 180 top
D34  Green  [0603-LED-ALT1]  185.17,75.64 180 top
D35  Green  [0603-LED-ALT1]  203.45,75.64 180 top
D36  Green  [0603-LED-ALT1]  221.74,75.64 180 top
D37  Green  [0603-LED-ALT1]  20.57,109.17 180 top
D38  Green  [0603-LED-ALT1]  38.86,109.17 180 top
D39  Green  [0603-LED-ALT1]  57.15,109.17 180 top
D40  Green  [0603-LED-ALT1]  75.44,109.17 180 top
D41  Green  [0603-LED-ALT1]  93.73,109.17 180 top
D42  Green  [0603-LED-ALT1]  112.01,109.17 180 top
D43  Green  [0603-LED-ALT1]  130.3,109.17 180 top
D44  Green  [0603-LED-ALT1]  148.59,109.17 180 top
D45  Green  [0603-LED-ALT1]  166.88,109.17 180 top
D46  Green  [0603-LED-ALT1]  185.17,109.17 180 top
D47  Green  [0603-LED-ALT1]  203.45,109.17 180 top
D48  Green  [0603-LED-ALT1]  221.74,109.17 180 top
D49  Green  [0603-LED-ALT1]  20.57,142.7 180 top
D50  Green  [0603-LED-ALT1]  38.86,142.7 180 top
D51  Green  [0603-LED-ALT1]  57.15,142.7 180 top
D52  Green  [0603-LED-ALT1]  75.44,142.7 180 top
D53  Green  [0603-LED-ALT1]  93.73,142.7 180 top
D54  Green  [0603-LED-ALT1]  112.01,142.7 180 top
D55  Green  [0603-LED-ALT1]  130.3,142.7 180 top
D56  Green  [0603-LED-ALT1]  148.59,142.7 180 top
D57  Green  [0603-LED-ALT1]  166.88,142.7 180 top
D58  Green  [0603-LED-ALT1]  185.17,142.7 180 top
D59  Green  [0603-LED-ALT1]  203.45,142.7 180 top
D60  Green  [0603-LED-ALT1]  221.74,142.7 180 top
D61  Green  [0603-LED-ALT1]  20.57,176.23 180 top
D62  Green  [0603-LED-ALT1]  38.86,176.23 180 top
D63  Green  [0603-LED-ALT1]  57.15,176.23 180 top
D64  Green  [0603-LED-ALT1]  75.44,176.23 180 top
D65  Green  [0603-LED-ALT1]  93.73,176.23 180 top
D66  Green  [0603-LED-ALT1]  112.01,176.23 180 top
D67  Green  [0603-LED-ALT1]  130.3,176.23 180 top
D68  Green  [0603-LED-ALT1]  148.59,176.23 180 top
D69  Green  [0603-LED-ALT1]  166.88,176.23 180 top
D70  Green  [0603-LED-ALT1]  185.17,176.23 180 top
D71  Green  [0603-LED-ALT1]  203.45,176.23 180 top
D72  Green  [0603-LED-ALT1]  221.74,176.23 180 top
E$1  [FIDUCIAL-1.5X3]  4.57,9.4 0 top
E$4  [FIDUCIAL-1X2]  228.22,11.94 0 top
E$6  [FIDUCIAL-1X2]  228.22,202.44 180 top
JP1  FTDI Basic  [1X06]  22.1,38.61 0 bottom
JP2  [1X02]  20.45,24.77 90 bottom
JP3  [1X02]  20.45,14.35 90 bottom
JP4  [1X12]  41.66,36.07 270 bottom
JP5  FIDUCIALUFIDUCIAL  [MICRO-FIDUCIAL]  10.79,36.07 0 top
JP6  [1X12]  23.37,36.07 270 bottom
JP7  [1X12]  8.13,8.13 90 bottom
JP8  FIDUCIALUFIDUCIAL  [MICRO-FIDUCIAL]  19.3,9.4 0 top
JP9  [1X12]  26.42,8.13 90 bottom
JP10  [1X02]  38.73,24.77 90 bottom
JP11  FTDI Basic  [1X06]  40.39,38.61 0 bottom
JP12  FIDUCIALUFIDUCIAL  [MICRO-FIDUCIAL]  29.08,36.07 0 top
JP13  FIDUCIALUFIDUCIAL  [MICRO-FIDUCIAL]  37.59,9.4 0 top
JP14  [1X02]  38.73,14.35 90 bottom
JP15  [1X12]  59.94,36.07 270 bottom
JP16  [1X12]  44.7,8.13 90 bottom
JP17  [1X02]  57.02,24.77 90 bottom
JP18  FTDI Basic  [1X06]  58.67,38.61 0 bottom
JP19  FIDUCIALUFIDUCIAL  [MICRO-FIDUCIAL]  47.37,36.07 0 top
JP20  FIDUCIALUFIDUCIAL  [MICRO-FIDUCIAL]  55.88,9.4 0 top
JP21  [1X02]  57.02,14.35 90 bottom
JP22  [1X12]  78.23,36.07 270 bottom
JP23  [1X12]  62.99,8.13 90 bottom
JP24  [1X02]  75.31,24.77 90 bottom
JP25  FTDI Basic  [1X06]  76.96,38.61 0 bottom
JP26  FIDUCIALUFIDUCIAL  [MICRO-FIDUCIAL]  65.66,36.07 0 top
JP27  FIDUCIALUFIDUCIAL  [MICRO-FIDUCIAL]  74.17,9.4 0 top
JP28  [1X02]  75.31,14.35 90 bottom
JP29  [1X12]  96.52,36.07 270 bottom
JP30  [1X12]  81.28,8.13 90 bottom
JP31  [1X02]  93.6,24.77 90 bottom
JP32  FTDI Basic  [1X06]  95.25,38.61 0 bottom
JP33  FIDUCIALUFIDUCIAL  [MICRO-FIDUCIAL]  83.95,36.07 0 top
JP34  FIDUCIALUFIDUCIAL  [MICRO-FIDUCIAL]  92.46,9.4 0 top
JP35  [1X02]  93.6,14.35 90 bottom
JP36  [1X12]  114.81,36.07 270 bottom
JP37  [1X12]  99.57,8.13 90 bottom
JP38  [1X02]  111.89,24.77 90 bottom
JP39  FTDI Basic  [1X06]  113.54,38.61 0 bottom
JP40  FIDUCIALUFIDUCIAL  [MICRO-FIDUCIAL]  102.23,36.07 0 top
JP41  FIDUCIALUFIDUCIAL  [MICRO-FIDUCIAL]  110.74,9.4 0 top
JP42  [1X02]  111.89,14.35 90 bottom
JP43  [1X12]  133.1,36.07 270 bottom
JP44  [1X12]  117.86,8.13 90 bottom
JP45  [1X02]  130.18,24.77 90 bottom
JP46  FTDI Basic  [1X06]  131.83,38.61 0 bottom
JP47  FIDUCIALUFIDUCIAL  [MICRO-FIDUCIAL]  120.52,36.07 0 top
JP48  FIDUCIALUFIDUCIAL  [MICRO-FIDUCIAL]  129.03,9.4 0 top
JP49  [1X02]  130.18,14.35 90 bottom
JP50  [1X12]  151.38,36.07 270 bottom
JP51  [1X12]  136.14,8.13 90 bottom
JP52  [1X02]  148.46,24.77 90 bottom
JP53  FTDI Basic  [1X06]  150.11,38.61 0 bottom
JP54  FIDUCIALUFIDUCIAL  [MICRO-FIDUCIAL]  138.81,36.07 0 top
JP55  FIDUCIALUFIDUCIAL  [MICRO-FIDUCIAL]  147.32,9.4 0 top
JP56  [1X02]  148.46,14.35 90 bottom
JP57  [1X12]  169.67,36.07 270 bottom
JP58  [1X12]  154.43,8.13 90 bottom
JP59  [1X02]  166.75,24.77 90 bottom
JP60  FTDI Basic  [1X06]  168.4,38.61 0 bottom
JP61  FIDUCIALUFIDUCIAL  [MICRO-FIDUCIAL]  157.1,36.07 0 top
JP62  FIDUCIALUFIDUCIAL  [MICRO-FIDUCIAL]  165.61,9.4 0 top
JP63  [1X02]  166.75,14.35 90 bottom
JP64  [1X12]  187.96,36.07 270 bottom
JP65  [1X12]  172.72,8.13 90 bottom
JP66  [1X02]  185.04,24.77 90 bottom
JP67  FTDI Basic  [1X06]  186.69,38.61 0 bottom
JP68  FIDUCIALUFIDUCIAL  [MICRO-FIDUCIAL]  175.39,36.07 0 top
JP69  FIDUCIALUFIDUCIAL  [MICRO-FIDUCIAL]  183.9,9.4 0 top
JP70  [1X02]  185.04,14.35 90 bottom
JP71  [1X12]  206.25,36.07 270 bottom
JP72  [1X12]  191.01,8.13 90 bottom
JP73  [1X02]  203.33,24.77 90 bottom
JP74  FTDI Basic  [1X06]  204.98,38.61 0 bottom
JP75  FIDUCIALUFIDUCIAL  [MICRO-FIDUCIAL]  193.68,36.07 0 top
JP76  FIDUCIALUFIDUCIAL  [MICRO-FIDUCIAL]  202.18,9.4 0 top
JP77  [1X02]  203.33,14.35 90 bottom
JP78  [1X12]  224.54,36.07 270 bottom
JP79  [1X12]  209.3,8.13 90 bottom
JP80  [1X02]  221.62,24.77 90 bottom
JP81  FTDI Basic  [1X06]  223.27,38.61 0 bottom
JP82  FIDUCIALUFIDUCIAL  [MICRO-FIDUCIAL]  211.96,36.07 0 top
JP83  FIDUCIALUFIDUCIAL  [MICRO-FIDUCIAL]  220.47,9.4 0 top
JP84  [1X02]  221.62,14.35 90 bottom
JP85  [1X12]  23.37,69.6 270 bottom
JP86  [1X12]  8.13,41.66 90 bottom
JP87  [1X02]  20.45,58.29 90 bottom
JP88  FTDI Basic  [1X06]  22.1,72.14 0 bottom
JP89  FIDUCIALUFIDUCIAL  [MICRO-FIDUCIAL]  10.79,69.6 0 top
JP90  FIDUCIALUFIDUCIAL  [MICRO-FIDUCIAL]  19.3,42.93 0 top
JP91  [1X02]  20.45,47.88 90 bottom
JP92  [1X12]  41.66,69.6 270 bottom
JP93  [1X12]  26.42,41.66 90 bottom
JP94  [1X02]  38.73,58.29 90 bottom
JP95  FTDI Basic  [1X06]  40.39,72.14 0 bottom
JP96  FIDUCIALUFIDUCIAL  [MICRO-FIDUCIAL]  29.08,69.6 0 top
JP97  FIDUCIALUFIDUCIAL  [MICRO-FIDUCIAL]  37.59,42.93 0 top
JP98  [1X02]  38.73,47.88 90 bottom
JP99  [1X12]  59.94,69.6 270 bottom
JP100  [1X12]  44.7,41.66 90 bottom
JP101  [1X02]  57.02,58.29 90 bottom
JP102  FTDI Basic  [1X06]  58.67,72.14 0 bottom
JP103  FIDUCIALUFIDUCIAL  [MICRO-FIDUCIAL]  47.37,69.6 0 top
JP104  FIDUCIALUFIDUCIAL  [MICRO-FIDUCIAL]  55.88,42.93 0 top
JP105  [1X02]  57.02,47.88 90 bottom
JP106  [1X12]  78.23,69.6 270 bottom
JP107  [1X12]  62.99,41.66 90 bottom
JP108  [1X02]  75.31,58.29 90 bottom
JP109  FTDI Basic  [1X06]  76.96,72.14 0 bottom
JP110  FIDUCIALUFIDUCIAL  [MICRO-FIDUCIAL]  65.66,69.6 0 top
JP111  FIDUCIALUFIDUCIAL  [MICRO-FIDUCIAL]  74.17,42.93 0 top
JP112  [1X02]  75.31,47.88 90 bottom
JP113  [1X12]  96.52,69.6 270 bottom
JP114  [1X12]  81.28,41.66 90 bottom
JP115  [1X02]  93.6,58.29 90 bottom
JP116  FTDI Basic  [1X06]  95.25,72.14 0 bottom
JP117  FIDUCIALUFIDUCIAL  [MICRO-FIDUCIAL]  83.95,69.6 0 top
JP118  FIDUCIALUFIDUCIAL  [MICRO-FIDUCIAL]  92.46,42.93 0 top
JP119  [1X02]  93.6,47.88 90 bottom
JP120  [1X12]  114.81,69.6 270 bottom
JP121  [1X12]  99.57,41.66 90 bottom
JP122  [1X02]  111.89,58.29 90 bottom
JP123  FTDI Basic  [1X06]  113.54,72.14 0 bottom
JP124  FIDUCIALUFIDUCIAL  [MICRO-FIDUCIAL]  102.23,69.6 0 top
JP125  FIDUCIALUFIDUCIAL  [MICRO-FIDUCIAL]  110.74,42.93 0 top
JP126  [1X02]  111.89,47.88 90 bottom
JP127  [1X12]  133.1,69.6 270 bottom
JP128  [1X12]  117.86,41.66 90 bottom
JP129  [1X02]  130.18,58.29 90 bottom
JP130  FTDI Basic  [1X06]  131.83,72.14 0 bottom
JP131  FIDUCIALUFIDUCIAL  [MICRO-FIDUCIAL]  120.52,69.6 0 top
JP132  FIDUCIALUFIDUCIAL  [MICRO-FIDUCIAL]  129.03,42.93 0 top
JP133  [1X02]  130.18,47.88 90 bottom
JP134  [1X12]  151.38,69.6 270 bottom
JP135  [1X12]  136.14,41.66 90 bottom
JP136  [1X02]  148.46,58.29 90 bottom
JP137  FTDI Basic  [1X06]  150.11,72.14 0 bottom
JP138  FIDUCIALUFIDUCIAL  [MICRO-FIDUCIAL]  138.81,69.6 0 top
JP139  FIDUCIALUFIDUCIAL  [MICRO-FIDUCIAL]  147.32,42.93 0 top
JP140  [1X02]  148.46,47.88 90 bottom
JP141  [1X12]  169.67,69.6 270 bottom
JP142  [1X12]  154.43,41.66 90 bottom
JP143  [1X02]  166.75,58.29 90 bottom
JP144  FTDI Basic  [1X06]  168.4,72.14 0 bottom
JP145  FIDUCIALUFIDUCIAL  [MICRO-FIDUCIAL]  157.1,69.6 0 top
JP146  FIDUCIALUFIDUCIAL  [MICRO-FIDUCIAL]  165.61,42.93 0 top
JP147  [1X02]  166.75,47.88 90 bottom
JP148  [1X12]  187.96,69.6 270 bottom
JP149  [1X12]  172.72,41.66 90 bottom
JP150  [1X02]  185.04,58.29 90 bottom
JP151  FTDI Basic  [1X06]  186.69,72.14 0 bottom
JP152  FIDUCIALUFIDUCIAL  [MICRO-FIDUCIAL]  175.39,69.6 0 top
JP153  FIDUCIALUFIDUCIAL  [MICRO-FIDUCIAL]  183.9,42.93 0 top
JP154  [1X02]  185.04,47.88 90 bottom
JP155  [1X12]  206.25,69.6 270 bottom
JP156  [1X12]  191.01,41.66 90 bottom
JP157  [1X02]  203.33,58.29 90 bottom
JP158  FTDI Basic  [1X06]  204.98,72.14 0 bottom
JP159  FIDUCIALUFIDUCIAL  [MICRO-FIDUCIAL]  193.68,69.6 0 top
JP160  FIDUCIALUFIDUCIAL  [MICRO-FIDUCIAL]  202.18,42.93 0 top
JP161  [1X02]  203.33,47.88 90 bottom
JP162  [1X12]  224.54,69.6 270 bottom
JP163  [1X12]  209.3,41.66 90 bottom
JP164  [1X02]  221.62,58.29 90 bottom
JP165  FTDI Basic  [1X06]  223.27,72.14 0 bottom
JP166  FIDUCIALUFIDUCIAL  [MICRO-FIDUCIAL]  211.96,69.6 0 top
JP167  FIDUCIALUFIDUCIAL  [MICRO-FIDUCIAL]  220.47,42.93 0 top
JP168  [1X02]  221.62,47.88 90 bottom
JP169  [1X12]  23.37,103.12 270 bottom
JP170  [1X12]  8.13,75.18 90 bottom
JP171  [1X02]  20.45,91.82 90 bottom
JP172  FTDI Basic  [1X06]  22.1,105.66 0 bottom
JP173  FIDUCIALUFIDUCIAL  [MICRO-FIDUCIAL]  10.79,103.12 0 top
JP174  FIDUCIALUFIDUCIAL  [MICRO-FIDUCIAL]  19.3,76.45 0 top
JP175  [1X02]  20.45,81.41 90 bottom
JP176  [1X12]  41.66,103.12 270 bottom
JP177  [1X12]  26.42,75.18 90 bottom
JP178  [1X02]  38.73,91.82 90 bottom
JP179  FTDI Basic  [1X06]  40.39,105.66 0 bottom
JP180  FIDUCIALUFIDUCIAL  [MICRO-FIDUCIAL]  29.08,103.12 0 top
JP181  FIDUCIALUFIDUCIAL  [MICRO-FIDUCIAL]  37.59,76.45 0 top
JP182  [1X02]  38.73,81.41 90 bottom
JP183  [1X12]  59.94,103.12 270 bottom
JP184  [1X12]  44.7,75.18 90 bottom
JP185  [1X02]  57.02,91.82 90 bottom
JP186  FTDI Basic  [1X06]  58.67,105.66 0 bottom
JP187  FIDUCIALUFIDUCIAL  [MICRO-FIDUCIAL]  47.37,103.12 0 top
JP188  FIDUCIALUFIDUCIAL  [MICRO-FIDUCIAL]  55.88,76.45 0 top
JP189  [1X02]  57.02,81.41 90 bottom
JP190  [1X12]  78.23,103.12 270 bottom
JP191  [1X12]  62.99,75.18 90 bottom
JP192  [1X02]  75.31,91.82 90 bottom
JP193  FTDI Basic  [1X06]  76.96,105.66 0 bottom
JP194  FIDUCIALUFIDUCIAL  [MICRO-FIDUCIAL]  65.66,103.12 0 top
JP195  FIDUCIALUFIDUCIAL  [MICRO-FIDUCIAL]  74.17,76.45 0 top
JP196  [1X02]  75.31,81.41 90 bottom
JP197  [1X12]  96.52,103.12 270 bottom
JP198  [1X12]  81.28,75.18 90 bottom
JP199  [1X02]  93.6,91.82 90 bottom
JP200  FTDI Basic  [1X06]  95.25,105.66 0 bottom
JP201  FIDUCIALUFIDUCIAL  [MICRO-FIDUCIAL]  83.95,103.12 0 top
JP202  FIDUCIALUFIDUCIAL  [MICRO-FIDUCIAL]  92.46,76.45 0 top
JP203  [1X02]  93.6,81.41 90 bottom
JP204  [1X12]  114.81,103.12 270 bottom
JP205  [1X12]  99.57,75.18 90 bottom
JP206  [1X02]  111.89,91.82 90 bottom
JP207  FTDI Basic  [1X06]  113.54,105.66 0 bottom
JP208  FIDUCIALUFIDUCIAL  [MICRO-FIDUCIAL]  102.23,103.12 0 top
JP209  FIDUCIALUFIDUCIAL  [MICRO-FIDUCIAL]  110.74,76.45 0 top
JP210  [1X02]  111.89,81.41 90 bottom
JP211  [1X12]  133.1,103.12 270 bottom
JP212  [1X12]  117.86,75.18 90 bottom
JP213  [1X02]  130.18,91.82 90 bottom
JP214  FTDI Basic  [1X06]  131.83,105.66 0 bottom
JP215  FIDUCIALUFIDUCIAL  [MICRO-FIDUCIAL]  120.52,103.12 0 top
JP216  FIDUCIALUFIDUCIAL  [MICRO-FIDUCIAL]  129.03,76.45 0 top
JP217  [1X02]  130.18,81.41 90 bottom
JP218  [1X12]  151.38,103.12 270 bottom
JP219  [1X12]  136.14,75.18 90 bottom
JP220  [1X02]  148.46,91.82 90 bottom
JP221  FTDI Basic  [1X06]  150.11,105.66 0 bottom
JP222  FIDUCIALUFIDUCIAL  [MICRO-FIDUCIAL]  138.81,103.12 0 top
JP223  FIDUCIALUFIDUCIAL  [MICRO-FIDUCIAL]  147.32,76.45 0 top
JP224  [1X02]  148.46,81.41 90 bottom
JP225  [1X12]  169.67,103.12 270 bottom
JP226  [1X12]  154.43,75.18 90 bottom
JP227  [1X02]  166.75,91.82 90 bottom
JP228  FTDI Basic  [1X06]  168.4,105.66 0 bottom
JP229  FIDUCIALUFIDUCIAL  [MICRO-FIDUCIAL]  157.1,103.12 0 top
JP230  FIDUCIALUFIDUCIAL  [MICRO-FIDUCIAL]  165.61,76.45 0 top
JP231  [1X02]  166.75,81.41 90 bottom
JP232  [1X12]  187.96,103.12 270 bottom
JP233  [1X12]  172.72,75.18 90 bottom
JP234  [1X02]  185.04,91.82 90 bottom
JP235  FTDI Basic  [1X06]  186.69,105.66 0 bottom
JP236  FIDUCIALUFIDUCIAL  [MICRO-FIDUCIAL]  175.39,103.12 0 top
JP237  FIDUCIALUFIDUCIAL  [MICRO-FIDUCIAL]  183.9,76.45 0 top
JP238  [1X02]  185.04,81.41 90 bottom
JP239  [1X12]  206.25,103.12 270 bottom
JP240  [1X12]  191.01,75.18 90 bottom
JP241  [1X02]  203.33,91.82 90 bottom
JP242  FTDI Basic  [1X06]  204.98,105.66 0 bottom
JP243  FIDUCIALUFIDUCIAL  [MICRO-FIDUCIAL]  193.68,103.12 0 top
JP244  FIDUCIALUFIDUCIAL  [MICRO-FIDUCIAL]  202.18,76.45 0 top
JP245  [1X02]  203.33,81.41 90 bottom
JP246  [1X12]  224.54,103.12 270 bottom
JP247  [1X12]  209.3,75.18 90 bottom
JP248  [1X02]  221.62,91.82 90 bottom
JP249  FTDI Basic  [1X06]  223.27,105.66 0 bottom
JP250  FIDUCIALUFIDUCIAL  [MICRO-FIDUCIAL]  211.96,103.12 0 top
JP251  FIDUCIALUFIDUCIAL  [MICRO-FIDUCIAL]  220.47,76.45 0 top
JP252  [1X02]  221.62,81.41 90 bottom
JP253  [1X12]  23.37,136.65 270 bottom
JP254  [1X12]  8.13,108.71 90 bottom
JP255  [1X02]  20.45,125.35 90 bottom
JP256  FTDI Basic  [1X06]  22.1,139.19 0 bottom
JP257  FIDUCIALUFIDUCIAL  [MICRO-FIDUCIAL]  10.79,136.65 0 top
JP258  FIDUCIALUFIDUCIAL  [MICRO-FIDUCIAL]  19.3,109.98 0 top
JP259  [1X02]  20.45,114.94 90 bottom
JP260  [1X12]  41.66,136.65 270 bottom
JP261  [1X12]  26.42,108.71 90 bottom
JP262  [1X02]  38.73,125.35 90 bottom
JP263  FTDI Basic  [1X06]  40.39,139.19 0 bottom
JP264  FIDUCIALUFIDUCIAL  [MICRO-FIDUCIAL]  29.08,136.65 0 top
JP265  FIDUCIALUFIDUCIAL  [MICRO-FIDUCIAL]  37.59,109.98 0 top
JP266  [1X02]  38.73,114.94 90 bottom
JP267  [1X12]  59.94,136.65 270 bottom
JP268  [1X12]  44.7,108.71 90 bottom
JP269  [1X02]  57.02,125.35 90 bottom
JP270  FTDI Basic  [1X06]  58.67,139.19 0 bottom
JP271  FIDUCIALUFIDUCIAL  [MICRO-FIDUCIAL]  47.37,136.65 0 top
JP272  FIDUCIALUFIDUCIAL  [MICRO-FIDUCIAL]  55.88,109.98 0 top
JP273  [1X02]  57.02,114.94 90 bottom
JP274  [1X12]  78.23,136.65 270 bottom
JP275  [1X12]  62.99,108.71 90 bottom
JP276  [1X02]  75.31,125.35 90 bottom
JP277  FTDI Basic  [1X06]  76.96,139.19 0 bottom
JP278  FIDUCIALUFIDUCIAL  [MICRO-FIDUCIAL]  65.66,136.65 0 top
JP279  FIDUCIALUFIDUCIAL  [MICRO-FIDUCIAL]  74.17,109.98 0 top
JP280  [1X02]  75.31,114.94 90 bottom
JP281  [1X12]  96.52,136.65 270 bottom
JP282  [1X12]  81.28,108.71 90 bottom
JP283  [1X02]  93.6,125.35 90 bottom
JP284  FTDI Basic  [1X06]  95.25,139.19 0 bottom
JP285  FIDUCIALUFIDUCIAL  [MICRO-FIDUCIAL]  83.95,136.65 0 top
JP286  FIDUCIALUFIDUCIAL  [MICRO-FIDUCIAL]  92.46,109.98 0 top
JP287  [1X02]  93.6,114.94 90 bottom
JP288  [1X12]  114.81,136.65 270 bottom
JP289  [1X12]  99.57,108.71 90 bottom
JP290  [1X02]  111.89,125.35 90 bottom
JP291  FTDI Basic  [1X06]  113.54,139.19 0 bottom
JP292  FIDUCIALUFIDUCIAL  [MICRO-FIDUCIAL]  102.23,136.65 0 top
JP293  FIDUCIALUFIDUCIAL  [MICRO-FIDUCIAL]  110.74,109.98 0 top
JP294  [1X02]  111.89,114.94 90 bottom
JP295  [1X12]  133.1,136.65 270 bottom
JP296  [1X12]  117.86,108.71 90 bottom
JP297  [1X02]  130.18,125.35 90 bottom
JP298  FTDI Basic  [1X06]  131.83,139.19 0 bottom
JP299  FIDUCIALUFIDUCIAL  [MICRO-FIDUCIAL]  120.52,136.65 0 top
JP300  FIDUCIALUFIDUCIAL  [MICRO-FIDUCIAL]  129.03,109.98 0 top
JP301  [1X02]  130.18,114.94 90 bottom
JP302  [1X12]  151.38,136.65 270 bottom
JP303  [1X12]  136.14,108.71 90 bottom
JP304  [1X02]  148.46,125.35 90 bottom
JP305  FTDI Basic  [1X06]  150.11,139.19 0 bottom
JP306  FIDUCIALUFIDUCIAL  [MICRO-FIDUCIAL]  138.81,136.65 0 top
JP307  FIDUCIALUFIDUCIAL  [MICRO-FIDUCIAL]  147.32,109.98 0 top
JP308  [1X02]  148.46,114.94 90 bottom
JP309  [1X12]  169.67,136.65 270 bottom
JP310  [1X12]  154.43,108.71 90 bottom
JP311  [1X02]  166.75,125.35 90 bottom
JP312  FTDI Basic  [1X06]  168.4,139.19 0 bottom
JP313  FIDUCIALUFIDUCIAL  [MICRO-FIDUCIAL]  157.1,136.65 0 top
JP314  FIDUCIALUFIDUCIAL  [MICRO-FIDUCIAL]  165.61,109.98 0 top
JP315  [1X02]  166.75,114.94 90 bottom
JP316  [1X12]  187.96,136.65 270 bottom
JP317  [1X12]  172.72,108.71 90 bottom
JP318  [1X02]  185.04,125.35 90 bottom
JP319  FTDI Basic  [1X06]  186.69,139.19 0 bottom
JP320  FIDUCIALUFIDUCIAL  [MICRO-FIDUCIAL]  175.39,136.65 0 top
JP321  FIDUCIALUFIDUCIAL  [MICRO-FIDUCIAL]  183.9,109.98 0 top
JP322  [1X02]  185.04,114.94 90 bottom
JP323  [1X12]  206.25,136.65 270 bottom
JP324  [1X12]  191.01,108.71 90 bottom
JP325  [1X02]  203.33,125.35 90 bottom
JP326  FTDI Basic  [1X06]  204.98,139.19 0 bottom
JP327  FIDUCIALUFIDUCIAL  [MICRO-FIDUCIAL]  193.68,136.65 0 top
JP328  FIDUCIALUFIDUCIAL  [MICRO-FIDUCIAL]  202.18,109.98 0 top
JP329  [1X02]  203.33,114.94 90 bottom
JP330  [1X12]  224.54,136.65 270 bottom
JP331  [1X12]  209.3,108.71 90 bottom
JP332  [1X02]  221.62,125.35 90 bottom
JP333  FTDI Basic  [1X06]  223.27,139.19 0 bottom
JP334  FIDUCIALUFIDUCIAL  [MICRO-FIDUCIAL]  211.96,136.65 0 top
JP335  FIDUCIALUFIDUCIAL  [MICRO-FIDUCIAL]  220.47,109.98 0 top
JP336  [1X02]  221.62,114.94 90 bottom
JP337  [1X12]  23.37,170.18 270 bottom
JP338  [1X12]  8.13,142.24 90 bottom
JP339  [1X02]  20.45,158.88 90 bottom
JP340  FTDI Basic  [1X06]  22.1,172.72 0 bottom
JP341  FIDUCIALUFIDUCIAL  [MICRO-FIDUCIAL]  10.79,170.18 0 top
JP342  FIDUCIALUFIDUCIAL  [MICRO-FIDUCIAL]  19.3,143.51 0 top
JP343  [1X02]  20.45,148.46 90 bottom
JP344  [1X12]  41.66,170.18 270 bottom
JP345  [1X12]  26.42,142.24 90 bottom
JP346  [1X02]  38.73,158.88 90 bottom
JP347  FTDI Basic  [1X06]  40.39,172.72 0 bottom
JP348  FIDUCIALUFIDUCIAL  [MICRO-FIDUCIAL]  29.08,170.18 0 top
JP349  FIDUCIALUFIDUCIAL  [MICRO-FIDUCIAL]  37.59,143.51 0 top
JP350  [1X02]  38.73,148.46 90 bottom
JP351  [1X12]  59.94,170.18 270 bottom
JP352  [1X12]  44.7,142.24 90 bottom
JP353  [1X02]  57.02,158.88 90 bottom
JP354  FTDI Basic  [1X06]  58.67,172.72 0 bottom
JP355  FIDUCIALUFIDUCIAL  [MICRO-FIDUCIAL]  47.37,170.18 0 top
JP356  FIDUCIALUFIDUCIAL  [MICRO-FIDUCIAL]  55.88,143.51 0 top
JP357  [1X02]  57.02,148.46 90 bottom
JP358  [1X12]  78.23,170.18 270 bottom
JP359  [1X12]  62.99,142.24 90 bottom
JP360  [1X02]  75.31,158.88 90 bottom
JP361  FTDI Basic  [1X06]  76.96,172.72 0 bottom
JP362  FIDUCIALUFIDUCIAL  [MICRO-FIDUCIAL]  65.66,170.18 0 top
JP363  FIDUCIALUFIDUCIAL  [MICRO-FIDUCIAL]  74.17,143.51 0 top
JP364  [1X02]  75.31,148.46 90 bottom
JP365  [1X12]  96.52,170.18 270 bottom
JP366  [1X12]  81.28,142.24 90 bottom
JP367  [1X02]  93.6,158.88 90 bottom
JP368  FTDI Basic  [1X06]  95.25,172.72 0 bottom
JP369  FIDUCIALUFIDUCIAL  [MICRO-FIDUCIAL]  83.95,170.18 0 top
JP370  FIDUCIALUFIDUCIAL  [MICRO-FIDUCIAL]  92.46,143.51 0 top
JP371  [1X02]  93.6,148.46 90 bottom
JP372  [1X12]  114.81,170.18 270 bottom
JP373  [1X12]  99.57,142.24 90 bottom
JP374  [1X02]  111.89,158.88 90 bottom
JP375  FTDI Basic  [1X06]  113.54,172.72 0 bottom
JP376  FIDUCIALUFIDUCIAL  [MICRO-FIDUCIAL]  102.23,170.18 0 top
JP377  FIDUCIALUFIDUCIAL  [MICRO-FIDUCIAL]  110.74,143.51 0 top
JP378  [1X02]  111.89,148.46 90 bottom
JP379  [1X12]  133.1,170.18 270 bottom
JP380  [1X12]  117.86,142.24 90 bottom
JP381  [1X02]  130.18,158.88 90 bottom
JP382  FTDI Basic  [1X06]  131.83,172.72 0 bottom
JP383  FIDUCIALUFIDUCIAL  [MICRO-FIDUCIAL]  120.52,170.18 0 top
JP384  FIDUCIALUFIDUCIAL  [MICRO-FIDUCIAL]  129.03,143.51 0 top
JP385  [1X02]  130.18,148.46 90 bottom
JP386  [1X12]  151.38,170.18 270 bottom
JP387  [1X12]  136.14,142.24 90 bottom
JP388  [1X02]  148.46,158.88 90 bottom
JP389  FTDI Basic  [1X06]  150.11,172.72 0 bottom
JP390  FIDUCIALUFIDUCIAL  [MICRO-FIDUCIAL]  138.81,170.18 0 top
JP391  FIDUCIALUFIDUCIAL  [MICRO-FIDUCIAL]  147.32,143.51 0 top
JP392  [1X02]  148.46,148.46 90 bottom
JP393  [1X12]  169.67,170.18 270 bottom
JP394  [1X12]  154.43,142.24 90 bottom
JP395  [1X02]  166.75,158.88 90 bottom
JP396  FTDI Basic  [1X06]  168.4,172.72 0 bottom
JP397  FIDUCIALUFIDUCIAL  [MICRO-FIDUCIAL]  157.1,170.18 0 top
JP398  FIDUCIALUFIDUCIAL  [MICRO-FIDUCIAL]  165.61,143.51 0 top
JP399  [1X02]  166.75,148.46 90 bottom
JP400  [1X12]  187.96,170.18 270 bottom
JP401  [1X12]  172.72,142.24 90 bottom
JP402  [1X02]  185.04,158.88 90 bottom
JP403  FTDI Basic  [1X06]  186.69,172.72 0 bottom
JP404  FIDUCIALUFIDUCIAL  [MICRO-FIDUCIAL]  175.39,170.18 0 top
JP405  FIDUCIALUFIDUCIAL  [MICRO-FIDUCIAL]  183.9,143.51 0 top
JP406  [1X02]  185.04,148.46 90 bottom
JP407  [1X12]  206.25,170.18 270 bottom
JP408  [1X12]  191.01,142.24 90 bottom
JP409  [1X02]  203.33,158.88 90 bottom
JP410  FTDI Basic  [1X06]  204.98,172.72 0 bottom
JP411  FIDUCIALUFIDUCIAL  [MICRO-FIDUCIAL]  193.68,170.18 0 top
JP412  FIDUCIALUFIDUCIAL  [MICRO-FIDUCIAL]  202.18,143.51 0 top
JP413  [1X02]  203.33,148.46 90 bottom
JP414  [1X12]  224.54,170.18 270 bottom
JP415  [1X12]  209.3,142.24 90 bottom
JP416  [1X02]  221.62,158.88 90 bottom
JP417  FTDI Basic  [1X06]  223.27,172.72 0 bottom
JP418  FIDUCIALUFIDUCIAL  [MICRO-FIDUCIAL]  211.96,170.18 0 top
JP419  FIDUCIALUFIDUCIAL  [MICRO-FIDUCIAL]  220.47,143.51 0 top
JP420  [1X02]  221.62,148.46 90 bottom
JP421  [1X12]  23.37,203.71 270 bottom
JP422  [1X12]  8.13,175.77 90 bottom
JP423  [1X02]  20.45,192.41 90 bottom
JP424  FTDI Basic  [1X06]  22.1,206.25 0 bottom
JP425  FIDUCIALUFIDUCIAL  [MICRO-FIDUCIAL]  10.79,203.71 0 top
JP426  FIDUCIALUFIDUCIAL  [MICRO-FIDUCIAL]  19.3,177.04 0 top
JP427  [1X02]  20.45,181.99 90 bottom
JP428  [1X12]  41.66,203.71 270 bottom
JP429  [1X12]  26.42,175.77 90 bottom
JP430  [1X02]  38.73,192.41 90 bottom
JP431  FTDI Basic  [1X06]  40.39,206.25 0 bottom
JP432  FIDUCIALUFIDUCIAL  [MICRO-FIDUCIAL]  29.08,203.71 0 top
JP433  FIDUCIALUFIDUCIAL  [MICRO-FIDUCIAL]  37.59,177.04 0 top
JP434  [1X02]  38.73,181.99 90 bottom
JP435  [1X12]  59.94,203.71 270 bottom
JP436  [1X12]  44.7,175.77 90 bottom
JP437  [1X02]  57.02,192.41 90 bottom
JP438  FTDI Basic  [1X06]  58.67,206.25 0 bottom
JP439  FIDUCIALUFIDUCIAL  [MICRO-FIDUCIAL]  47.37,203.71 0 top
JP440  FIDUCIALUFIDUCIAL  [MICRO-FIDUCIAL]  55.88,177.04 0 top
JP441  [1X02]  57.02,181.99 90 bottom
JP442  [1X12]  78.23,203.71 270 bottom
JP443  [1X12]  62.99,175.77 90 bottom
JP444  [1X02]  75.31,192.41 90 bottom
JP445  FTDI Basic  [1X06]  76.96,206.25 0 bottom
JP446  FIDUCIALUFIDUCIAL  [MICRO-FIDUCIAL]  65.66,203.71 0 top
JP447  FIDUCIALUFIDUCIAL  [MICRO-FIDUCIAL]  74.17,177.04 0 top
JP448  [1X02]  75.31,181.99 90 bottom
JP449  [1X12]  96.52,203.71 270 bottom
JP450  [1X12]  81.28,175.77 90 bottom
JP451  [1X02]  93.6,192.41 90 bottom
JP452  FTDI Basic  [1X06]  95.25,206.25 0 bottom
JP453  FIDUCIALUFIDUCIAL  [MICRO-FIDUCIAL]  83.95,203.71 0 top
JP454  FIDUCIALUFIDUCIAL  [MICRO-FIDUCIAL]  92.46,177.04 0 top
JP455  [1X02]  93.6,181.99 90 bottom
JP456  [1X12]  114.81,203.71 270 bottom
JP457  [1X12]  99.57,175.77 90 bottom
JP458  [1X02]  111.89,192.41 90 bottom
JP459  FTDI Basic  [1X06]  113.54,206.25 0 bottom
JP460  FIDUCIALUFIDUCIAL  [MICRO-FIDUCIAL]  102.23,203.71 0 top
JP461  FIDUCIALUFIDUCIAL  [MICRO-FIDUCIAL]  110.74,177.04 0 top
JP462  [1X02]  111.89,181.99 90 bottom
JP463  [1X12]  133.1,203.71 270 bottom
JP464  [1X12]  117.86,175.77 90 bottom
JP465  [1X02]  130.18,192.41 90 bottom
JP466  FTDI Basic  [1X06]  131.83,206.25 0 bottom
JP467  FIDUCIALUFIDUCIAL  [MICRO-FIDUCIAL]  120.52,203.71 0 top
JP468  FIDUCIALUFIDUCIAL  [MICRO-FIDUCIAL]  129.03,177.04 0 top
JP469  [1X02]  130.18,181.99 90 bottom
JP470  [1X12]  151.38,203.71 270 bottom
JP471  [1X12]  136.14,175.77 90 bottom
JP472  [1X02]  148.46,192.41 90 bottom
JP473  FTDI Basic  [1X06]  150.11,206.25 0 bottom
JP474  FIDUCIALUFIDUCIAL  [MICRO-FIDUCIAL]  138.81,203.71 0 top
JP475  FIDUCIALUFIDUCIAL  [MICRO-FIDUCIAL]  147.32,177.04 0 top
JP476  [1X02]  148.46,181.99 90 bottom
JP477  [1X12]  169.67,203.71 270 bottom
JP478  [1X12]  154.43,175.77 90 bottom
JP479  [1X02]  166.75,192.41 90 bottom
JP480  FTDI Basic  [1X06]  168.4,206.25 0 bottom
JP481  FIDUCIALUFIDUCIAL  [MICRO-FIDUCIAL]  157.1,203.71 0 top
JP482  FIDUCIALUFIDUCIAL  [MICRO-FIDUCIAL]  165.61,177.04 0 top
JP483  [1X02]  166.75,181.99 90 bottom
JP484  [1X12]  187.96,203.71 270 bottom
JP485  [1X12]  172.72,175.77 90 bottom
JP486  [1X02]  185.04,192.41 90 bottom
JP487  FTDI Basic  [1X06]  186.69,206.25 0 bottom
JP488  FIDUCIALUFIDUCIAL  [MICRO-FIDUCIAL]  175.39,203.71 0 top
JP489  FIDUCIALUFIDUCIAL  [MICRO-FIDUCIAL]  183.9,177.04 0 top
JP490  [1X02]  185.04,181.99 90 bottom
JP491  [1X12]  206.25,203.71 270 bottom
JP492  [1X12]  191.01,175.77 90 bottom
JP493  [1X02]  203.33,192.41 90 bottom
JP494  FTDI Basic  [1X06]  204.98,206.25 0 bottom
JP495  FIDUCIALUFIDUCIAL  [MICRO-FIDUCIAL]  193.68,203.71 0 top
JP496  FIDUCIALUFIDUCIAL  [MICRO-FIDUCIAL]  202.18,177.04 0 top
JP497  [1X02]  203.33,181.99 90 bottom
JP498  [1X12]  224.54,203.71 270 bottom
JP499  [1X12]  209.3,175.77 90 bottom
JP500  [1X02]  221.62,192.41 90 bottom
JP501  FTDI Basic  [1X06]  223.27,206.25 0 bottom
JP502  FIDUCIALUFIDUCIAL  [MICRO-FIDUCIAL]  211.96,203.71 0 top
JP503  FIDUCIALUFIDUCIAL  [MICRO-FIDUCIAL]  220.47,177.04 0 top
JP504  [1X02]  221.62,181.99 90 bottom
LED1  Red  [0603-LED-ALT1]  15.77,28.73 270 top
LED2  Red  [0603-LED-ALT1]  34.06,28.73 270 top
LED3  Red  [0603-LED-ALT1]  52.35,28.73 270 top
LED4  Red  [0603-LED-ALT1]  70.64,28.73 270 top
LED5  Red  [0603-LED-ALT1]  88.93,28.73 270 top
LED6  Red  [0603-LED-ALT1]  107.21,28.73 270 top
LED7  Red  [0603-LED-ALT1]  125.5,28.73 270 top
LED8  Red  [0603-LED-ALT1]  143.79,28.73 270 top
LED9  Red  [0603-LED-ALT1]  162.08,28.73 270 top
LED10  Red  [0603-LED-ALT1]  180.37,28.73 270 top
LED11  Red  [0603-LED-ALT1]  198.65,28.73 270 top
LED12  Red  [0603-LED-ALT1]  216.94,28.73 270 top
LED13  Red  [0603-LED-ALT1]  15.77,62.26 270 top
LED14  Red  [0603-LED-ALT1]  34.06,62.26 270 top
LED15  Red  [0603-LED-ALT1]  52.35,62.26 270 top
LED16  Red  [0603-LED-ALT1]  70.64,62.26 270 top
LED17  Red  [0603-LED-ALT1]  88.93,62.26 270 top
LED18  Red  [0603-LED-ALT1]  107.21,62.26 270 top
LED19  Red  [0603-LED-ALT1]  125.5,62.26 270 top
LED20  Red  [0603-LED-ALT1]  143.79,62.26 270 top
LED21  Red  [0603-LED-ALT1]  162.08,62.26 270 top
LED22  Red  [0603-LED-ALT1]  180.37,62.26 270 top